# Altium PCB FPC_ES_TO_PD.PcbDoc
Units mil, origin at the board's own origin, x right, y up, seen from the top; angles counter-clockwise.
Board outline 335.04 x 561.57 mil, 2 copper layers (Top Layer, Bottom Layer), stack 3.76 mil thick; 2 components, 12 nets, 28 pads, 73 vias.
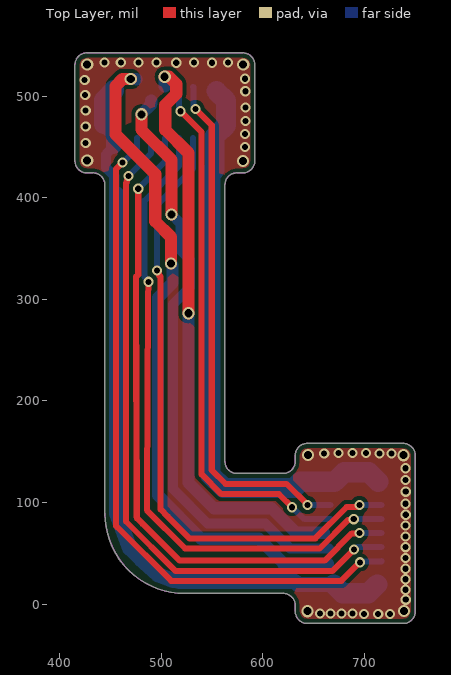
[diagram p0: Top Layer view]
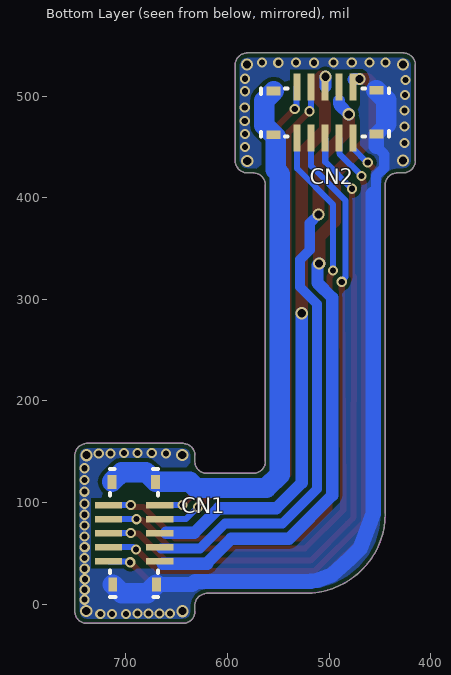
[diagram p1: Bottom Layer view, seen from below]

## Layer stack, top to bottom
Board Layer Stack Top Coverlay 1: solder mask 0.472, Polyimide, Dk 3.4
Top Layer: signal copper 1.38
Dielectric 1: core 1, PI, Dk 4.2
Bottom Layer: signal copper 1.38
Board Layer Stack Bottom Coverlay 1: solder mask 0.472, Polyimide, Dk 3.4

## Board outline
444.73,89.18 444.73,263.98 444.73,277.47 444.73,375.9 444.73,412.56 ccw(c432.92,412.56) 432.92,424.37 427.01,424.37 cw(c427.01,436.18) 415.2,436.18 415.2,530.67 cw(c427.01,530.67) 427.01,542.48 580.56,542.48 cw(c580.56,530.67) 592.37,530.67 592.37,436.18 cw(c580.56,436.18) 580.56,424.37 574.65,424.37 ccw(c574.65,412.56) 562.84,412.56 562.84,263.98 562.84,140.36 ccw(c574.65,140.36) 574.65,128.55 620.32,128.55 ccw(c620.32,140.36) 632.13,140.36 632.13,146.26 cw(c643.94,146.26) 643.94,158.07 738.43,158.07 cw(c738.43,146.26) 750.24,146.26 750.24,-7.28 cw(c738.43,-7.28) 738.43,-19.09 643.94,-19.09 cw(c643.94,-7.28) 632.13,-7.28 632.13,-1.37 ccw(c620.32,-1.37) 620.32,10.44 523.47,10.44 cw(c523.47,89.18)

## Design rules (kind name [scope] priority, off if disabled: settings)
Clearance [All] p1: gap=4 ignorepadtopadclearanceinfootprint=TRUE
ComponentClearance [All] p1: gap=0 collisioncheckmode=3 verticalgap=0 showdistances=FALSE
HoleToHoleClearance [All] p1: gap=9 allowstackedmicrovias=TRUE
MinimumSolderMaskSliver [All] p1: minsoldermaskwidth=0
PlaneClearance [All] p1: clearance=10
PolygonConnect [All] p1: connectstyle=Direct reliefconductorwidth=10 reliefentries=4 polygonreliefangle="90 Angle" airgapwidth=10
RoutingVias [All] p1: holewidth=10 width=16 viastyle="Through Hole" minholewidth=4 minwidth=8 maxholewidth=28 maxwidth=50
SilkToSilkClearance [All] p1: silktosilkclearance=0
SilkToSolderMaskClearance [IsPad] p1: minsilkscreentomaskgap=0 clearancetoexposedcopper=TRUE
SolderMaskExpansion [All] p1: expansion=4 istentingtop=FALSE
Width [All] p1: maxlimit=30 minlimit=3.5 preferedwidth=6
24 further rules are at their usual default settings.

## Components (designator, comment, footprint, x,y, rotation, side; value= is the part's Value field where it differs from the comment)
CN1 "BK13C06-10DP/2-0.35V" CONN-SMD_10P-P0.35_BK13C06-10DP 717.41,4.82 r180 bottom locked
CN2 "BK13C06-10DP/2-0.35V" CONN-SMD_10P-P0.35_BK13C06-10DP 439.11,458.28 r90 bottom locked

## Footprints (in the part's own frame and the unit in brackets; to place one, negate y for a bottom-side part, rotate by r counter-clockwise, add the part's x,y. Pads: shape width x height; smd on the part's side, far side on the other; paste and mask are expansions set on the pad)
CONN-SMD_10P-P0.35_BK13C06-10DP [mm]
  rect 0.68x0.168 smd paste+0 mask+0.051: 1(1.288,0.95) 2(1.288,1.3) 3(1.288,1.65) 4(1.288,2) 5(1.288,2.35) 6(0.008,2.35) 7(0.008,2) 8(0.008,1.65) 9(0.008,1.3) 10(0.008,0.95)
  rect 0.22x0.35 smd paste+0 mask+0.051: 11(0.094,2.933) 12(1.184,2.933) 14(0.113,0.367) 15(1.203,0.367)
  Top Layer region: 0.318,-0.018 0.558,0.262 0.558,0.262 0.758,0.262 0.758,0.262 0.998,-0.018
  Top Layer region: 0.978,3.318 0.738,3.038 0.738,3.038 0.538,3.038 0.538,3.038 0.298,3.318
  silkscreen extent 0.05,0.05 1.25,3.25, body extent -0.16,0.12 1.44,3.17, height 0.48

## Part data
CN1 CN2: library part 10pin_dp_BK13C06-10DP/2-0.35V, JLCPCB Part Class="Extended Part", Manufacturer=null, Contributor=lcsc, Manufacturer Part=BK13C06-10DP/2-0.35V, spicePre=C, spiceSymbolName=BK13C06-10DP/2-0.35V, Supplier=LCSC, Supplier Part=C3040902

## Via types
v1: diameter 10, hole 6, Top Layer to Bottom Layer, tented both sides, 59 vias
v2: diameter 12, hole 8, Top Layer to Bottom Layer, tented both sides, 14 vias

## Nets (pads, with @x,y where several pads share a name; then routed paths per layer and width w, separated by ;. In a path a pad name is that pad's centre, name@x,y a point inside that pad or via, vN(x,y) a via of type N, cw(c..) or ccw(c..) an arc to the next point about the centre after c; other vN are vias at no path point)
GH3020_INT: CN1.4 CN2.4 | length 535.5
  Top Layer w6: v1(519.21,485.03) 539.92,464.32 539.92,127.63 559.39,108.16 616.1,108.16 v1(628.95,95.3)
  Bottom Layer w6: CN2.4 517.85,487.47 519.21,486.11 v1(519.21,485.03) ; v1(628.95,95.3) 629.3,95.3 641.04,83.56 CN1.4
GH3020_RES: CN1.9 CN2.9 | length 668.9
  Top Layer w6: v1(467.98,421.46) 465.54,413.7 465.54,81.25 514.06,32.72 668.94,32.72 v1(690.03,53.81) 689.87,53.61 v1@689.58,53.32
  Bottom Layer w6: v1@468.05,421.46 489.98,443.39 489.98,458.31 CN2.9 ; v1(690.03,53.81) 691.12,53.81 693.31,56 CN1.9
GND: CN1.14 CN1.15 CN2.14 CN2.15 | length 731.2
  Bottom Layer w10: 453.56,450.32 445.8,442.56 445.8,429.47 453.98,421.29 453.98,403.66
  Bottom Layer w15: 443.89,472.41 CN2.14 453.56,450.32 ; 456.48,403.66 456.48,272.61 456.48,89.07 469.28,54.95 479.53,44.7 497.14,28.69 512.67,23.06 ccw(c523.47,89.18) 523.47,22.19 625.78,22.19 631.81,22.19 634.67,19.32 CN1.15@669.99,19.32
  Bottom Layer w20: 443.89,472.41 443.89,495.99 CN2.15 ; CN1.15 678.79,10.52 704.19,10.52 CN1.14
  other v1: 656.47,-9.25 666.81,-9.44 677.7,-9.25 688.6,-9.44 699.86,-9.81 713.72,-9.72 725.22,-9.72 740.83,4.28 740.59,14.07 740.47,24.45 740.59,34.71 740.71,45.45 740.59,55.95 740.71,66.57 740.71,77.31 740.83,87.93 740.71,98.67 740.83,110.6 740.7,122.08 740.61,133.63 715.11,148.02 726.74,148.02 660.58,148.27 674.62,148.7 688.49,148.7 701.84,148.79 582.8,449.9 425.84,453.73 582.8,462.69 425.84,470.03 583,475.38 425.84,485.9 583,488.8 425.35,500.94 582.96,504.71 424.85,515.67 582.72,517.04 477.73,532.91 514.94,532.8 532.59,532.91 550.01,532.8 444.43,533.15 460.43,533.15 495.62,533.03 566.01,533.03
  other v2: 644.22,-7 738.99,-6.72 644.5,146.82 738.71,146.54 427.29,436.46 580.56,436.18 427.29,530.95 580.84,530.95
I2C1_SCL: CN1.6 CN2.6 | length 624.6
  Top Layer w6: v1(496.16,328.19) 496.16,327.11 498.16,325.11 498.16,323.51 499.54,322.13 499.54,93.16 506.67,86.02 527.98,64.69 651.89,64.69 682.73,95.52 692.15,95.52 694.18,97.56 v1(695.27,97.56)
  Bottom Layer w6: v1(496.16,328.19) v1(496.16,328.19) 496.12,393.2 531.63,428.7 CN2.6 ; v1(695.27,97.56) 695.48,97.34 CN1.6
I2C1_SDA: CN1.7 CN2.7 | length 640.4
  Top Layer w6: v1(487.54,317.16) 487.33,300.13 486.13,105.65 486.13,92.4 523.84,54.69 656.03,54.69 684.11,82.76 688.95,82.76 v1(689.71,83.52)
  Bottom Layer w6: v1(487.54,317.16) 487.54,318.15 483.76,321.92 483.76,397.12 517.85,431.2 CN2.7 ; v1(689.71,83.52) v1(689.71,83.52) CN1.7
I2C3_SCL: CN1.8 CN2.8 | length 655.1
  Top Layer w6: v1(477.54,408.73) 477.54,324.13 475.54,322.13 475.54,312.2 476.14,85.66 476.51,84.41 481.9,79.03 518.21,42.72 660.98,42.72 687.76,69.5 694.97,69.5 v1(695.27,69.79)
  Bottom Layer w6: v1(477.54,408.73) 477.54,408.83 503.85,435.15 503.85,458.4 CN2.8 ; v1(695.27,69.79) CN1.8
I2C3_SDA: CN1.10 CN2.10 | length 682.6
  Top Layer w6: v1(461.94,434.46) 455.54,428.06 455.54,77.1 457.29,75.35 509.92,22.72 677.47,22.72 v1(695.8,41.06)
  Bottom Layer w6: v1(461.94,434.46) 462.43,434.46 476.51,448.54 CN2.10 ; v1(695.8,41.06) 696.89,41.06 697.75,41.92 716.77,41.92 CN1.10
ICM_INT1: CN1.5 CN2.5 | length 515.8
  Top Layer w6: v1(533.85,487.35) 549.92,471.29 549.92,131.77 563.53,118.16 623.62,118.16 v1(644.22,97.56)
  Bottom Layer w6: CN2.5 531.93,508.7 531.93,490.36 533.85,488.44 v1(533.85,487.35) ; v1(644.22,97.56) 644.44,97.34 CN1.5
SW1_VDD1V8: CN1.2 CN2.2 | length 590.7
  Top Layer w12: v2(480.64,482) 480.64,466.93 510.39,437.19 v2(510.39,383.38)
  Bottom Layer w10: v2(510.39,383.38) 519.03,374.74 519.03,348.43 528.59,338.86 528.59,312.03 511.92,295.35 511.92,113.19 545.81,79.3 602.53,79.3 627.14,54.69 CN1.2@665.36,54.69
  Bottom Layer w12: v2(480.64,482) 489.81,491.17 489.81,492.39 490.28,492.86 490.29,495.48
SW2_VDD1V9: CN1.3 CN2.3 | length 584.3
  Top Layer w12: v2(503.59,518.99) 507.95,518.99 514.98,511.96 514.98,502.02 504.08,491.11 504.08,466.86 526.92,444.02 v2(526.92,286.21)
  Bottom Layer w12: CN2.3@503.59,509.48 v2(503.59,518.99) ; v2(526.92,286.21) 526.92,119.4 552.02,94.3 608.74,94.3 632.78,70.26 CN1.3@660.52,70.26
VCC_3V3: CN1.1 CN2.1 | length 651.4
  Top Layer w12: v2(470.22,516.72) 462.18,516.72 455.15,509.69 455.15,462.46 494.39,423.22 494.39,376.75 509.79,361.34 v2(509.79,335.03)
  Bottom Layer w12: v2(470.22,516.72) 475.53,516.72 CN2.1@475.86,516.39 ; v2(509.79,335.03) 511.38,333.44 511.38,316.03 496.92,301.57 496.92,106.97 539.6,64.3 596.32,64.3 619.95,40.66 619.95,39.69 CN1.1@664.09,39.69
VDD_5V: CN1.11 CN1.12 CN2.11 CN2.12 | length 568.6
  Bottom Layer w20: CN2.12 563.97,495.48 563.97,471.36 CN2.11 552.63,460.03 552.63,427.4 548.59,423.36 548.59,288.03 548.59,127.41 561.7,114.3 631.12,114.3 637.11,120.29 CN1.12 680.21,129.69 704.33,129.69 CN1.11

## Polygon pours and split planes (outlines as drawn)
GND on Top Layer "GND_L01_P001" (solid, remove dead copper, pour order 1): 367.14,577.53 1200.02,577.53 1200.02,-135.34 1200.92,-136.24 362.63,-136.24 362.63,575.27 364.89,577.53 367.14,577.53
GND on Bottom Layer "GND_L02_P003" (solid, remove dead copper, pour order 3): 338.35,612.92 1242.69,612.92 1243.66,611.95 1242.69,610.98 1242.69,-163.19 340.29,-163.19 339.32,-162.22 339.32,613.89

## Keep-outs
Keep-Out Layer:
  lines w0.5: 415.2,436.18 ccw(c427.01,436.18) 427.01,424.37 432.92,424.37 cw(c432.92,412.56) 444.73,412.56 444.73,396.81 444.73,375.9 444.73,277.47 444.73,263.98 444.73,89.18 ccw(c523.47,89.18) 523.47,10.44 620.32,10.44 cw(c620.32,-1.37) 632.13,-1.37 632.13,-7.28 ccw(c643.94,-7.28) 643.94,-19.09 738.43,-19.09 ccw(c738.43,-7.28) 750.24,-7.28 750.24,146.26 ccw(c738.43,146.26) 738.43,158.07 643.94,158.07 ccw(c643.94,146.26) 632.13,146.26 632.13,140.36 cw(c620.32,140.36) 620.32,128.55 574.65,128.55 cw(c574.65,140.36) 562.84,140.36 562.84,263.98 562.84,277.47 562.84,375.9 562.84,412.56 cw(c574.65,412.56) 574.65,424.37 580.56,424.37 ccw(c580.56,436.18) 592.37,436.18 592.37,530.67 ccw(c580.56,530.67) 580.56,542.48 427.01,542.48 ccw(c427.01,530.67) 415.2,530.67 415.2,436.18

## Silkscreen, mask and mechanical layers (free items; w line width, h text height)
Mechanical 1:
  lines w0.5: 415.48,436.46 ccw(c427.29,436.46) 427.29,424.65 433.2,424.65 cw(c433.2,412.84) 445.01,412.84 445.01,397.09 445.01,376.18 445.01,277.75 445.01,264.26 445.01,89.46 ccw(c523.75,89.46) 523.75,10.72 620.6,10.72 cw(c620.6,-1.1) 632.41,-1.1 632.41,-7 ccw(c644.22,-7) 644.22,-18.81 738.71,-18.81 ccw(c738.71,-7) 750.52,-7 750.52,146.54 ccw(c738.71,146.54) 738.71,158.35 644.22,158.35 ccw(c644.22,146.54) 632.41,146.54 632.41,140.64 cw(c620.6,140.64) 620.6,128.83 574.93,128.83 cw(c574.93,140.64) 563.12,140.64 563.12,264.26 563.12,277.75 563.12,376.18 563.12,412.84 cw(c574.93,412.84) 574.93,424.65 580.84,424.65 ccw(c580.84,436.46) 592.65,436.46 592.65,530.95 ccw(c580.84,530.95) 580.84,542.76 427.29,542.76 ccw(c427.29,530.95) 415.48,530.95 415.48,436.46
Mechanical 2:
  region: 580.96,542.69 580.96,542.92 585.57,542 589.47,539.39 592.08,535.48 593,530.88 592.77,436.39 593,436.39 592.08,431.78 589.47,427.87 585.57,425.26 580.96,424.35 575.05,424.58 427.41,424.58 427.41,424.35 422.81,425.26 418.9,427.87 416.29,431.78 415.37,436.39 415.6,530.88 415.37,530.88 416.29,535.48 418.9,539.39 422.81,542 427.41,542.92
  region: 743.27,157.47 747.18,154.86 749.79,150.95 750.71,146.34 750.48,-7.2 750.71,-7.2 749.79,-11.81 747.18,-15.71 743.27,-18.33 738.66,-19.24 644.18,-19.01 644.18,-19.24 639.57,-18.33 635.66,-15.71 633.05,-11.81 632.13,-7.2 632.36,-1.29 632.37,146.34 632.13,146.34 633.05,150.95 635.66,154.86 639.57,157.47 644.18,158.39 738.66,158.15 738.66,158.39
  text "top   / reinforced material: stainless steel / 0.2mm" at 668.52,449.77 h15
Mechanical 5:
  drawing of 306 lines, arcs and shapes, not listed
Mechanical 6:
  region: 580.84,542.76 580.84,542.99 585.45,542.08 589.35,539.47 591.96,535.56 592.88,530.95 592.65,436.46 592.88,436.46 591.96,431.85 589.35,427.95 585.45,425.34 580.84,424.42 574.93,424.65 427.29,424.65 427.29,424.42 422.69,425.34 418.78,427.95 416.17,431.85 415.25,436.46 415.48,530.95 415.25,530.95 416.17,535.56 418.78,539.47 422.69,542.08 427.29,542.99
  region: 743.32,157.67 747.23,155.06 749.84,151.15 750.75,146.54 750.52,-7 750.75,-7 749.84,-11.61 747.23,-15.52 743.32,-18.13 738.71,-19.04 644.22,-18.81 644.22,-19.04 639.62,-18.13 635.71,-15.52 633.1,-11.61 632.18,-7 632.41,-1.1 632.41,146.54 632.18,146.54 633.1,151.15 635.71,155.06 639.62,157.67 644.22,158.58 738.71,158.35 738.71,158.58
  lines w0.5: 563.12,397.09 563.12,412.84 ; 415.48,436.46 ccw(c427.29,436.46) 427.29,424.65 ; 415.48,436.46 ccw(c427.29,436.46) 427.29,424.65 ; 415.48,436.46 415.48,530.95 ; 415.48,436.46 415.48,530.95 ; 415.48,530.95 cw(c427.29,530.95) 427.29,542.76 ; 415.48,530.95 cw(c427.29,530.95) 427.29,542.76 ; 427.29,424.65 574.93,424.65 ; 427.29,424.65 433.2,424.65 cw(c433.2,412.84) 445.01,412.84 445.01,397.09 445.01,376.18 445.01,277.75 445.01,264.26 445.01,89.46 ccw(c523.75,89.46) 523.75,10.72 620.6,10.72 cw(c620.6,-1.1) 632.41,-1.1 ; 427.29,542.76 580.84,542.76 ; 427.29,542.76 580.84,542.76 ; 563.12,412.84 cw(c574.93,412.84) 574.93,424.65 ; 563.12,412.84 563.12,376.18 563.12,277.75 563.12,264.26 563.12,140.64 ccw(c574.93,140.64) 574.93,128.83 620.6,128.83 ccw(c620.6,140.64) 632.41,140.64 632.41,146.54 ; 574.93,424.65 580.84,424.65 ; 574.93,424.65 580.84,424.65 ; 580.84,424.65 ccw(c580.84,436.46) 592.65,436.46 ; 580.84,424.65 ccw(c580.84,436.46) 592.65,436.46 ; 580.84,542.76 cw(c580.84,530.95) 592.65,530.95 ; 580.84,542.76 cw(c580.84,530.95) 592.65,530.95 ; 592.65,436.46 592.65,530.95 ; 592.65,436.46 592.65,530.95 ; 632.41,-7 ccw(c644.22,-7) 644.22,-18.81 ; 632.41,-7 ccw(c644.22,-7) 644.22,-18.81 ; 632.41,-7 632.41,-1.1 ; 632.41,-7 632.41,-1.1 ; 632.41,-1.1 632.41,146.54 ; 632.41,146.54 cw(c644.22,146.54) 644.22,158.35 ; 632.41,146.54 cw(c644.22,146.54) 644.22,158.35 ; 644.22,-18.81 738.71,-18.81 ; 644.22,-18.81 738.71,-18.81 ; 644.22,158.35 738.71,158.35 ; 644.22,158.35 738.71,158.35 ; 738.71,-18.81 ccw(c738.71,-7) 750.52,-7 ; 738.71,-18.81 ccw(c738.71,-7) 750.52,-7 ; 738.71,158.35 cw(c738.71,146.54) 750.52,146.54 ; 738.71,158.35 cw(c738.71,146.54) 750.52,146.54 ; 750.52,-7 750.52,146.54 ; 750.52,-7 750.52,146.54
  text "TOP" at 481.76,277.79 h19.68